# Altium PCB PCB2.PcbDoc
Units mil, origin at the board's own origin, x right, y up, seen from the top; angles counter-clockwise.
Board outline 6000 x 4000 mil, 2 copper layers (Top Layer, Bottom Layer); 5 components, 4 nets, 28 pads, 0 vias.
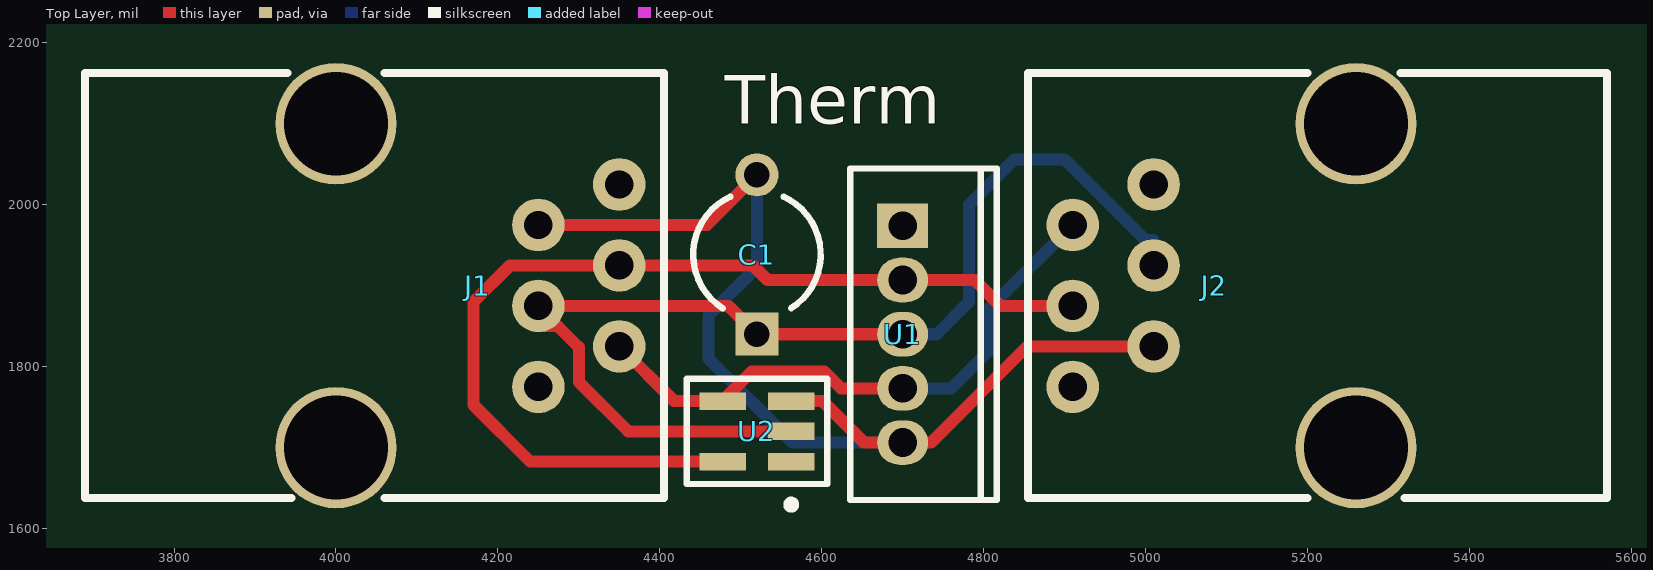
[diagram p0: Top Layer view]
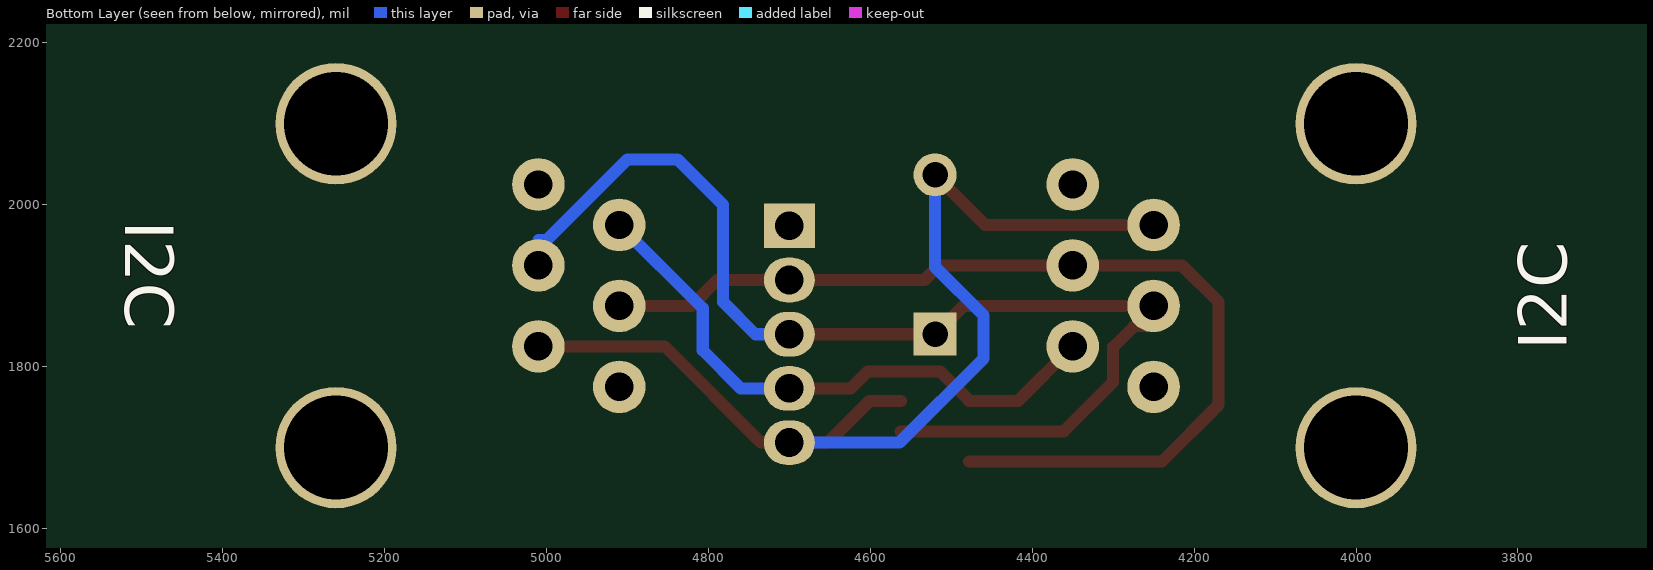
[diagram p1: Bottom Layer view, seen from below]

## Layer stack, top to bottom
Top Layer: signal copper 1.4
Dielectric: dielectric 12.6, FR-4, Dk 4.8
Bottom Layer: signal copper 1.4

## Board outline
1000,1000 7000,1000 7000,5000 1000,5000

## Design rules (kind name [scope] priority, off if disabled: settings)
Clearance [All] p1: gap=10
ComponentClearance [All] p1: gap=10 collisioncheckmode=0
HoleSize [All] p1: absolutevalues=TRUE maxlimit=200 minlimit=1 maxpercent=80.000 minpercent=20.000
PolygonConnect [All] p1: connectstyle=Relief reliefconductorwidth=10 reliefentries=4 polygonreliefangle="90 Angle"
RoomDefinition Sheet2 [InComponentClass('Sheet2')] p1: confinementstyle=ConfineIn formatcopy=TRUE outline 3660,1600 5600,1600 5600,2200 3660,2200
RoutingLayers [All] p1: top layer=Horizontal bottom layer=Vertical
RoutingVias [All] p1: holewidth=28 width=50 viastyle="Through Hole" minholewidth=28 minwidth=50 maxholewidth=28 maxwidth=50
SolderMaskExpansion [All] p1: expansion=4
TestPointUsage [All] p1: valid=0 allowmultiple=FALSE
Testpoint [All] p1: side=15 testpointundercomponent=TRUE minsize=40 maxsize=100 preferedsize=60 minholesize=0 maxholesize=40 preferedholesize=32 testpointgrid=1 style=1023 order=1234567890
Width [All] p1: maxlimit=15 minlimit=10 preferedwidth=10 toplayer_minwidth=15 toplayer_prefwidth=15 bottomlayer_minwidth=15 bottomlayer_prefwidth=15 minimp=50.000000 maximp=50.000000 favimp=50.000000
15 further rules are at their usual default settings.

## Components (designator, comment, footprint, x,y, rotation, side; value= is the part's Value field where it differs from the comment)
C1 "" CAPR5-4X5 4520,1840 r90 top
J1 "" RJ11 4000,2100 r270 top
J2 "" RJ11 5260,1700 r90 top
U1 "TC74 TO-220" SFM-T5/A4.6V-NOTEXT 4700,1840 r270 top
U2 "TC74 SOT-23A-5" SO-G5/Z3.6 4520,1720 r90 top

## Footprints (in the part's own frame and the unit in brackets; to place one, negate y for a bottom-side part, rotate by r counter-clockwise, add the part's x,y. Pads: shape width x height; smd on the part's side, far side on the other; paste and mask are expansions set on the pad)
CAPR5-4X5 [mm]
  rect 1.35x1.35 hole 0.8: 1(0,0)
  round 1.35 hole 0.8: 2(5,0)
  silkscreen extent 0.81,-2 4.32,2
RJ11 [mil]
  round 150 hole 128: 0(0,0) 0(400,0)
  round 65 hole 35: 1(75,350) 2(125,250) 3(175,350) 4(225,250) 5(275,350) 6(325,250)
  silkscreen extent -63,-310 463,405
SFM-T5/A4.6V-NOTEXT [mm]
  rect 1.4x1.6 hole 0.9: 1(-3.4,0)
  oval 1.4x1.6 hole 0.9: 2(-1.7,0) 3(0,0) 4(1.7,0) 5(3.4,0)
  silkscreen extent -5.2,-1.65 5.2,2.95
SO-G5/Z3.6 [mm]
  rect 0.55x1.45 smd: 1(-0.95,-1.075) 2(0,-1.075) 3(0.95,-1.075) 4(0.95,1.075) 5(-0.95,1.075)
  silkscreen extent -2.42,-2.2 1.65,2.2

## Part data
C1: library part Cap2, "Capacitor"
J1 J2: library part "Header 6", "Header, 6-Pin"

## Nets (pads, with @x,y where several pads share a name; then routed paths per layer and width w, separated by ;. In a path a pad name is that pad's centre, name@x,y a point inside that pad or via, vN(x,y) a via of type N, cw(c..) or ccw(c..) an arc to the next point about the centre after c; other vN are vias at no path point)
GND: C1.1 J1.4 J2.4 U1.3 U2.2 | length 1423
  Top Layer w15: U2.2 4361,1720 4300,1781 4300,1824 4274,1850 4250,1850 J1.4 4485,1875 C1.1 U1.3
  Bottom Layer w15: U1.3 4742,1840 4782,1880 4782,2000 4838,2056 4900,2056 5000,1956 5010,1956 J2.4
SCL: J1.5 J2.5 U1.4 U2.4 | length 726.6
  Top Layer w15: J1.5 4417.6,1757.4 U2.4@4477,1757.4 ; U2.4 U2.4@4477,1757.4 ; U1.4 4624,1773.07 4603.07,1794 4513.6,1794 4477.34,1757.74 U2.4@4477,1757.4
  Bottom Layer w15: U1.4 4760,1773.07 4807,1820.07 4807,1872 J2.5
SDA: J1.3 J2.3 U1.2 U2.5 | length 1243.4
  Top Layer w15: U2.5 4240,1682.6 4170,1752.6 4170,1880 4215,1925 J1.3 4515,1925 4533.07,1906.93 U1.2 4789,1906.93 4820.93,1875 J2.3
VCC: C1.2 J1.2 J2.2 U1.5 U2.3 | length 1348.5
  Top Layer w15: J1.2 4458.15,1975 C1.2 ; U2.3 4601,1757.4 4652.26,1706.14 U1.5 4735.14,1706.14 4854,1825 J2.2
  Bottom Layer w15: C1.2 4520,1923.15 4460,1863.15 4460,1810 4563.86,1706.14 U1.5
pads on no net: J1.0 J1.1 J1.6 J2.0 J2.1 J2.6 U1.1 U2.1

## Keep-outs
Mechanical 1:
  lines w10: 3660,1600 5600,1600 5600,2200 3660,2200 3660,1600

## Silkscreen, mask and mechanical layers (free items; w line width, h text height)
Top Overlay:
  text "Therm" at 4480,2100 h60
Bottom Overlay:
  text "I2C" at 5520,1980 h60 r90
  text "I2C" at 3740,1820 h60 r270